# EAGLE board lifetile (EAGLE 6.0)
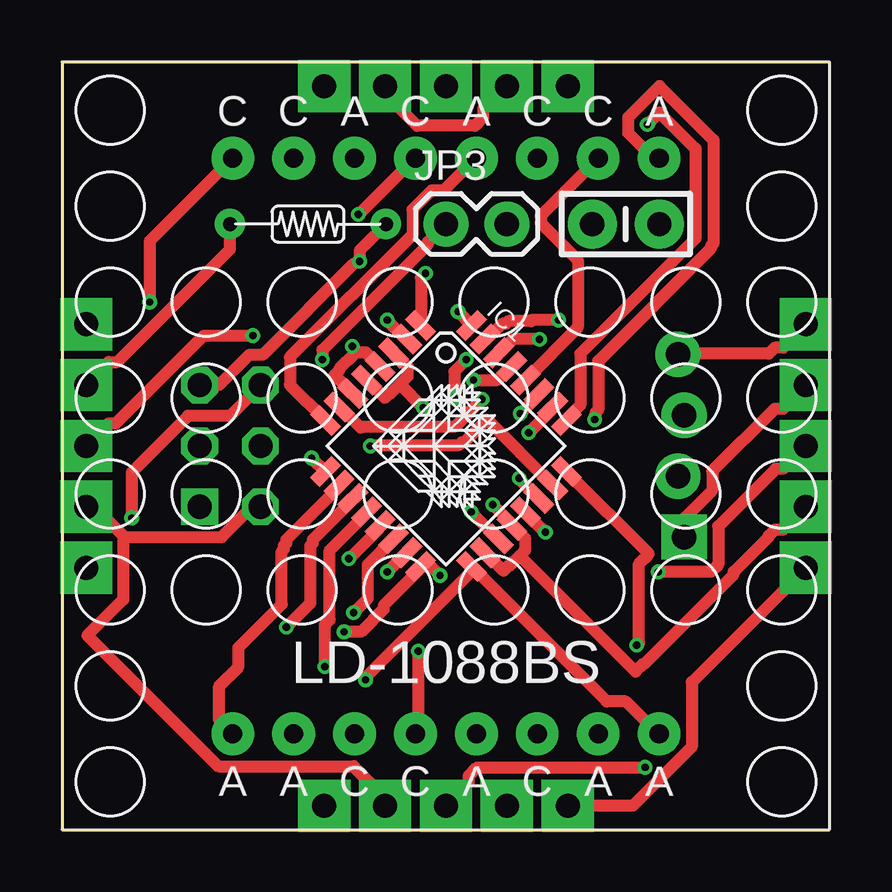
[diagram p0: board, top side]
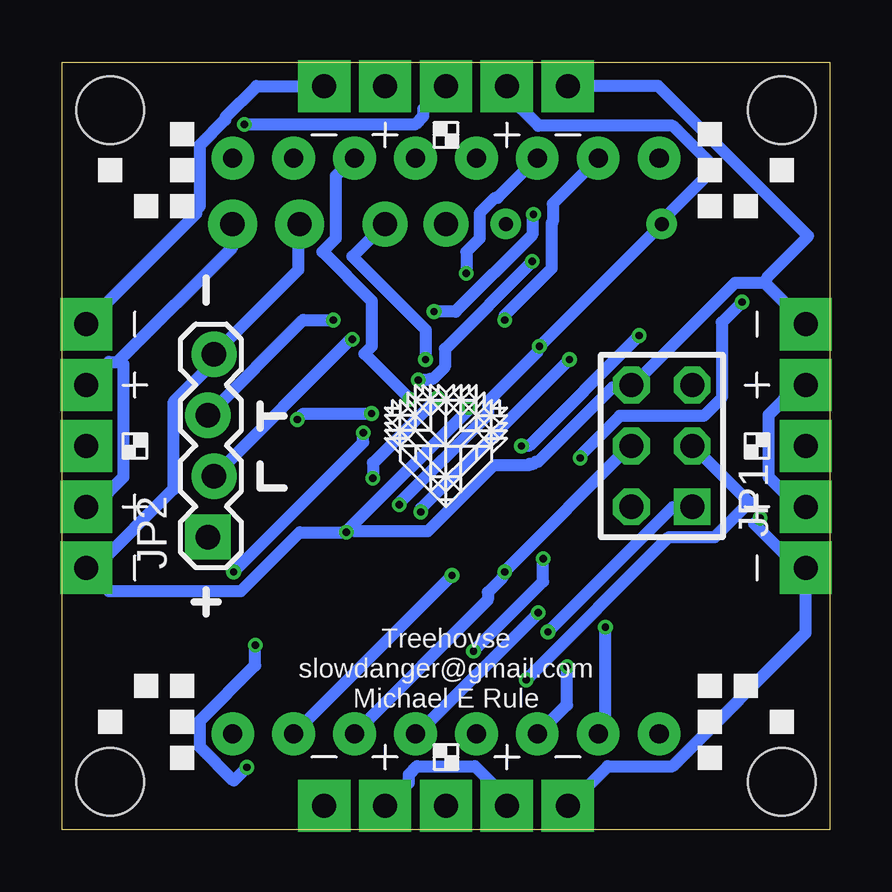
[diagram p1: board, bottom side, seen from below]

Size 32 x 32 mm. Coordinates in mm from the lower left corner, seen from the top.
Outline: 0,32 0,0 32,0 32,32 0,32
Copper layers (1*16): Top 0.035mm / dielectric 1.5mm / Bottom 0.035mm
Design rules: minimum track width 20mil, minimum drill 12mil, track to track 8mil, track to pad 8mil, pad to pad 8mil, via to via 8mil, smd to smd 0mil, copper to edge 10mil, drill to drill 10mil, minimum pad ring 10mil, minimum via ring 6mil, stop-mask expansion 2mil, vias tented up to drill 100mil, thermal gap 10mil
Holes 2.8 mm at 2,2 2,30 30,30 30,2

## Footprints (pad centres in the part's own frame; a part is rotated, then mirrored left to right if it is on the bottom)
CAP-PTH-SMALL-KIT = drill 1.016 pad 2.032: 1 -1.397,0; 2 1.397,0
TQFP32-08 = smd 1.27 x 0.559: 1 -4.293,2.8; 2 -4.293,2; 3 -4.293,1.2; 4 -4.293,0.4; 5 -4.293,-0.4; 6 -4.293,-1.2; 7 -4.293,-2; 8 -4.293,-2.8; 17 4.293,-2.8; 18 4.293,-2; 19 4.293,-1.2; 20 4.293,-0.4; 21 4.293,0.4; 22 4.293,1.2; 23 4.293,2; 24 4.293,2.8 | smd 0.559 x 1.27: 9 -2.8,-4.293; 10 -2,-4.293; 11 -1.2,-4.293; 12 -0.4,-4.293; 13 0.4,-4.293; 14 1.2,-4.293; 15 2,-4.293; 16 2.8,-4.293; 25 2.8,4.293; 26 2,4.293; 27 1.2,4.293; 28 0.4,4.293; 29 -0.4,4.293; 30 -1.2,4.293; 31 -2,4.293; 32 -2.8,4.293
AVR-ISP-6 = drill 1.016 square: 1 -2.54,-1.27 | drill 1.016 octagon: 2 -2.54,1.27; 3 0,-1.27; 4 0,1.27; 5 2.54,-1.27; 6 2.54,1.27
1X04_LOCK = drill 1.016 pad 1.88 square: 1 0,0.127 | drill 1.016 pad 1.88: 2 2.54,-0.127; 3 5.08,0.127; 4 7.62,-0.127
1X02 = drill 1.016 pad 1.88: 1 0,0; 2 2.54,0
LD-1088BS = drill 0.8 pad 1.778: A1 8.89,12; A2 1.27,12; A3 -3.81,12; A4 8.89,-12; A5 6.35,-12; A6 1.27,-12; A7 -6.35,-12; A8 -8.89,-12; C1 6.35,12; C2 3.81,12; C3 -1.27,12; C4 -6.35,12; C5 -8.89,12; C6 3.81,-12; C7 -1.27,-12; C8 -3.81,-12
R-7 = drill 0.6 pad 1.27: P$1 -3.25,0; P$2 3.25,0
EDGE_5_SMT_PTH = drill 1 pad 2.184 square: D 0,0; G1 -5.08,0; G2 5.08,0; V1 -2.54,0; V2 2.54,0

## Placement (x,y rotation side)
C3  [CAP-PTH-SMALL-KIT]  23.5,25.25 180 top
IC1  MEGA8-AI  [TQFP32-08]  16,16 315 top
JP1  AVR-ISP-6  [AVR-ISP-6]  7,16 90 bottom
JP2  [1X04_LOCK]  25.8,12.2 90 bottom
JP3  [1X02]  16,25.25 0 top
U$1  LD-1088BS  [LD-1088BS]  16,16 0 top
U$2  R-7  [R-7]  10.25,25.25 0 top
U$3  [LOGO]  16,16 0 bottom
U$4  EDGE_5_PTH  [EDGE_5_SMT_PTH]  31,16 90 bottom
U$5  EDGE_5_PTH  [EDGE_5_SMT_PTH]  16,31 0 bottom
U$6  EDGE_5_PTH  [EDGE_5_SMT_PTH]  16,1 180 bottom
U$7  [LOGO]  15.5,16 270 top
U$11  EDGE_5_PTH  [EDGE_5_SMT_PTH]  1,16 270 bottom

## Library data of the parts
C3 = SparkFun-Capacitors
IC1 = atmel; MPN: ATMEGA8-16AU; OC_FARNELL: 9171371; OC_NEWARK: 73M8863
JP1 = avr-5-4.16
JP2 JP3 = SparkFun-Connectors
U$1 U$2 U$4-U$6 U$11 = Mrule
U$3 U$7 = mrule2

## Nets
GND: C3.2 IC1.3 IC1.5 IC1.21 JP1.6 JP2.4 U$4.G1 U$4.G2 U$5.G1 U$5.G2 U$6.G1 U$6.G2 U$11.G1 U$11.G2
N$1: IC1.17 JP1.3 U$1.A4
N$2: IC1.16 JP1.1 U$1.A5
N$3: IC1.15 JP1.4 U$1.C6
N$4: IC1.14 U$1.A6
N$5: IC1.13 U$1.C7
N$6: IC1.12 U$1.C8
N$7: IC1.11 U$1.A7
N$8: IC1.10 U$1.A8
N$9: IC1.29 JP1.5 U$2.P$2
N$10: IC1.9 U$1.C5
N$11: IC1.2 U$1.C4
N$12: IC1.1 U$1.A3
N$13: IC1.32 U$1.C3
N$14: IC1.8 U$1.A2
N$15: IC1.7 U$1.C2
N$16: IC1.28 U$1.C1
N$17: IC1.27 U$1.A1
N$18: IC1.26 U$4.D
N$19: IC1.30 JP2.2
N$20: IC1.23 U$11.D
N$21: IC1.31 JP2.3
N$22: IC1.19 JP3.1
N$23: IC1.22 JP3.2
N$29: IC1.25 U$5.D
N$30: IC1.24 U$6.D
VCC: C3.1 IC1.4 IC1.6 IC1.18 IC1.20 JP1.2 JP2.1 U$2.P$1 U$4.V1 U$4.V2 U$5.V1 U$5.V2 U$6.V1 U$6.V2 U$11.V1 U$11.V2

## Tracks (layer width: path | path; a pad name or v marks a point on that pad's centre or on a via)
GND  (via drill 0.3)
  Top 0.508: v2.9,13 2.9,14.9 5.25,17.25 7,17.25 8.25,18.5 JP1.6 | JP2.4 25.7,19.85 29.45,19.85 29.7,20.1 30.05,20.1 31,21.05 U$4.G2 | 14.07,18.57 14.4,18.9 14.4,19.3 13.85,19.85 IC1.3 | 14.07,18.57 13.7,18.2 13.65,18.2 13.45,18 12.7,18.75 IC1.5 | v20.15,12.4 19.35,13.2 IC1.21 | v15.05,17.6 14.07,18.57 | U$6.G2 23.8,1 26.25,3.45 26.25,6.15 31,10.9 U$4.G1
  Bottom 0.508: U$6.G1 10.9,1 9.25,2.65 6.55,2.65 1,8.2 U$11.G2 1.25,11 1.4,11 3.15,12.75 v2.9,13 | 2.7,22.8 3.95,22.8 8.2,18.55 8.25,18.55 JP1.6 8.5,18.45 9.05,18.45 12.15,15.35 12.25,15.35 12.35,15.25 12.5,15.25 12.55,15.2 14,15.2 16.75,12.45 19.8,12.45 19.98,12.62 | 2.7,22.8 1,21.1 U$11.G1 | U$5.G2 7.15,31 0.9,24.75 2.6,23.05 2.7,22.8 | C3.2 22.15,25.25 22.15,23.35 25.65,19.85 JP2.4 25.8,19.6 25.8,19.4 27.35,17.85 27.35,14.2 30.65,10.9 U$4.G1 31,10.9 30.05,9.95 24.55,9.95 22.1,12.4 v20.15,12.4 20,12.6 19.98,12.62 | U$5.G1 23.9,31 25.2,29.7 25.2,29.6 26.25,28.55 26.25,26 26.4,25.85 26.4,25.7 31,21.1 U$4.G2 | v15.05,17.6 15.05,17.55 19.98,12.62
N$1  (via drill 0.3)
  Top 0.508: U$1.A4 24.85,4 23.5,5.35 22.7,5.35 17.1,10.95 IC1.17 17,10.7 12.65,6.35 v12.65,6.25
  Bottom 0.508: v12.65,6.25 6.7,12.2 4.8,12.2 3.35,13.65 5.7,16 JP1.3
N$2  (via drill 0.3)
  Top 0.508: v15.75,10.6 15.4,10.95 14.95,10.95 IC1.16 14.8,10.75 13.4,9.35 13.4,9.2 12.45,8.25 v11.75,8.25
  Bottom 0.508: U$1.A5 v15.75,10.6 | v11.75,8.25 6.55,13.45 5.75,13.45 JP1.1
N$3  (via drill 0.3)
  Top 0.508: v13.55,10.75 14.35,11.55 IC1.15
  Bottom 0.508: JP1.4 8.35,16 13.55,10.8 v13.55,10.75 13.65,10.5 14.25,9.9 14.25,9.6 19.8,4.05 U$1.C6
N$4  (via drill 0.3)
  Top 0.508: v12.15,9.05 12.75,9.65 12.75,11.05 13.8,12.1 IC1.14
  Bottom 0.508: v12.15,9.05 17.2,4 U$1.A6
N$5  (via drill 0.3)
  Top 0.508: v11.95,11.3 13.2,12.55 13.2,12.65 IC1.13 | v14.85,7.45 14.85,4.1 14.75,4 U$1.C7
  Bottom 0.508: v11.95,11.3 11.95,10.35 v14.85,7.45
N$6  (via drill 0.3)
  Top 0.508: v10.95,6.8 10.95,8.55 11.15,8.75 11.15,11.65 12.65,13.15 12.65,13.2 IC1.12
  Bottom 0.508: v10.95,6.8 10.95,5.2 12.15,4 U$1.C8
N$7  (via drill 0.3)
  Top 0.508: v9.35,8.45 10.35,9.45 10.35,11.85 10.45,11.95 10.45,12.1 12.1,13.75 12.1,13.8 IC1.11
  Bottom 0.508: v9.35,8.45 9.35,4.3 U$1.A7
N$8
  Top 0.508: IC1.10 11.55,14.35 11.55,14.3 9.35,12.1 9.35,11.95 9.25,11.85 9.25,11.7 9.15,11.6 9.15,9.4 7.35,7.6 7.35,6.8 6.55,6 6.55,4.55 U$1.A8
N$9  (via drill 0.3)
  Top 0.508: v17.15,18.75 18.15,18.75 18.7,19.3 18.75,19.3 IC1.29 | U$2.P$2 12.4,24.15 v12.4,23.7 12.15,23.6 8.35,19.8 7.8,19.8 6.55,18.55 5.75,18.55 JP1.5
  Bottom 0.508: v17.15,18.75 16.7,18.75 16.65,18.8 16.55,18.8 16.05,19.3 16.05,20.05 v12.4,23.7
N$10  (via drill 0.3)
  Top 0.508: v10.4,15.5 10.95,14.95 IC1.9 | v3.65,22 3.65,24.55 U$1.C5
  Bottom 0.508: v10.4,15.5 10.4,15.6 8.75,17.25 5.25,17.25 4.5,18 4.5,21.15 v3.65,22
N$11  (via drill 0.3)
  Top 0.508: v13.55,21.25 14.35,20.45 IC1.2
  Bottom 0.508: v13.55,21.25 13.55,21.45 11.6,23.4 11.6,25.3 11.55,25.35 11.55,26.1 U$1.C4
N$12  (via drill 0.3)
  Top 0.508: v15.15,23.2 14.95,23 14.95,21.05 IC1.1
  Bottom 0.508: v15.15,23.2 15.15,24.1 14.6,24.65 14.6,25.7 13.95,26.35 13.85,26.35 U$1.A3
N$13  (via drill 0.3)
  Top 0.508: v16.5,21.6 17.05,21.05 IC1.32 | v12.35,25.65 14.7,28 U$1.C3
  Bottom 0.508: v16.5,21.6 15.6,21.6 12.4,24.8 12.4,25.6 v12.35,25.65
N$14
  Top 0.508: IC1.8 10.95,17.1 9.5,18.55 9.5,19.7 14.6,24.8 14.6,25.85 15.4,26.65 15.9,26.65 17.25,28 U$1.A2
N$15  (via drill 0.3)
  Top 0.508: v17.5,17.95 16.35,16.8 12.5,16.8 12.45,16.75 11.6,17.6 IC1.7
  Bottom 0.508: v17.5,17.95 19.4,19.85 19.1,20.15 19.1,22.05 21.15,24.1 20.6,24.65 20.6,27.25 19.85,28 U$1.C2
N$16
  Top 0.508: U$1.C1 19.95,25.6 19.95,25.3 21.5,23.75 21.5,20.95 19.35,18.8 IC1.28
N$17  (via drill 0.3)
  Top 0.508: v19.1,17.35 19.85,18.1 19.85,18.15 IC1.27 | v22.2,17.1 22.2,17.25 22.25,17.3 22.25,17.4 22.35,17.5 22.35,19.55 27.05,24.25 27.05,24.35 27.15,24.45 27.15,28.75 24.9,31 23.6,29.7 23.6,29.05 24.75,27.9 24.85,28 U$1.A1
  Bottom 0.508: v19.1,17.35 21.95,17.35 v22.2,17.1
N$18  (via drill 0.3)
  Top 0.508: v19.45,16.55 20.4,17.5 20.4,17.6 IC1.26 | v24.85,10.75 27.05,10.75 27.35,11.05 27.35,12.65 29.75,15.05 30.05,15.05 U$4.D
  Bottom 0.508: v19.45,16.55 19.45,16.15 v24.85,10.75
N$19  (via drill 0.3)
  Top 0.508: v19.9,20.45 18.8,20.45 18.25,19.9 18.2,19.9 IC1.30
  Bottom 0.508: v19.9,20.45 19.95,20.45 25.65,14.75 JP2.2
N$20  (via drill 0.3)
  Top 0.508: v12.85,16 12.9,16.05 16.55,16.05 16.65,16.15 16.75,16.15 17.7,17.1 20.4,14.4 IC1.23 | v7.95,20.6 5.9,20.6 2.25,16.95 1.95,16.95 U$11.D
  Bottom 0.508: v12.85,16 12.55,16 v7.95,20.6
N$21  (via drill 0.3)
  Top 0.508: v20.7,21.25 19.6,21.25 19.55,21.2 18.6,21.2 18.5,21.1 18.35,21.1 17.7,20.45 17.65,20.45 IC1.31
  Bottom 0.508: v20.7,21.25 21.95,21.25 25.9,17.3 JP2.3
N$22  (via drill 0.3)
  Top 0.508: v17.05,13.25 18.15,12.15 IC1.19 | v10.85,19.6 10.85,20 15.25,24.4 15.25,24.5 JP3.1
  Bottom 0.508: v17.05,13.25 17.05,13.4 v10.85,19.6
N$23  (via drill 0.3)
  Top 0.508: v19.05,14.65 19.85,13.85 IC1.22 | v16.35,18 16.35,19.1 v16.85,19.6
  Bottom 0.508: v19.05,14.65 19.05,15.3 v16.35,18 | v16.85,19.6 16.85,20.85 19.9,23.9 JP3.2
N$29  (via drill 0.3)
  Top 0.508: v24.4,29.4 24.9,29.9 26.4,28.4 26.4,24.65 21.6,19.85 21.6,17.7 21.05,17.15 21.05,17.1 IC1.25
  Bottom 0.508: v24.4,29.4 17.3,29.4 16.95,29.75 16.95,30.05 U$5.D
N$30  (via drill 0.3)
  Top 0.508: v23.95,7.7 24.05,7.8 24.05,11.1 24.45,11.5 21.05,14.9 IC1.24 | v24.3,2.6 17.3,2.6 16.95,2.25 16.95,1.95 U$6.D
  Bottom 0.508: v23.95,7.7 23.95,6.85 26.25,4.55 26.25,3.45 24.85,2.05 v24.3,2.6
VCC  (via drill 0.3)
  Top 0.508: 19.07,11.43 19.3,11.65 19.3,12.15 18.8,12.65 IC1.20 18.6,12.9 v17.95,13.55 | 19.07,11.43 18.65,11 18.6,11 18.4,10.8 17.65,11.55 IC1.18 | 19.07,11.43 23.9,6.6 24.2,6.9 24.25,6.9 28,10.65 28,10.75 29.45,12.2 29.45,12.25 29.7,12.5 30.05,12.5 U$4.V1 | JP2.1 25.95,12.2 25.95,13 27.1,14.15 27.1,14.95 29.7,17.55 30.05,17.55 31,18.5 U$4.V2 | U$5.V2 13.5,31 13.5,30.65 14.8,29.35 17.2,29.35 17.55,29.7 17.55,30.05 18.5,31 U$5.V1 | 12.25,19.9 11.55,19.2 11.55,19.15 11.35,18.95 12.1,18.2 IC1.6 | 12.25,19.9 12.65,19.9 13.2,19.35 IC1.4 | v12.1,20.15 12.1,20.1 12.25,19.9 | 2.6,12.2 6.65,12.2 7.9,13.45 8.25,13.45 JP1.2 | 2.6,12.2 1.15,13.65 1,13.5 U$11.V2 | U$6.V1 13.45,1.35 12.15,2.65 6.5,2.65 1.05,8.1 2.55,9.6 2.55,11.95 2.6,12.2 | U$2.P$1 7,24.2 2.3,19.5 1.95,19.5 U$11.V1
  Bottom 0.508: 29.62,19.57 29.7,19.5 30.05,19.5 U$4.V2 | 29.62,19.57 24.9,24.3 C3.1 | U$4.V1 31,13.5 30.65,13.5 29.45,14.7 29.45,19.4 29.62,19.57 | U$5.V2 13.45,30.65 12.15,29.35 6.55,29.35 4.8,27.6 6.9,25.5 U$2.P$1 v12.1,20.15 12.2,19.9 14.25,17.85 14.25,17.3 17.95,13.6 v17.95,13.55 | U$6.V1 13.5,1 13.5,1.35 14.8,2.65 17.2,2.65 17.55,2.3 17.55,1.95 18.5,1 U$6.V2 | U$11.V1 1,18.5 1.35,18.5 2.55,17.3 2.55,14.7 1.15,13.3 U$11.V2

## Text on the board
bPlace: Treehovse | slowdanger@gmail.com | Michael E Rule